# Altium PCB Controller.PcbDoc (part 1 of 2)
Units mil, origin at the board's own origin, x right, y up, seen from the top; angles counter-clockwise.
Board outline 1500 x 3000 mil, 2 copper layers (Top Layer, Bottom Layer); 44 components, 27 nets, 191 pads, 283 vias.
Unrouted connection lines stored in the file: 1.
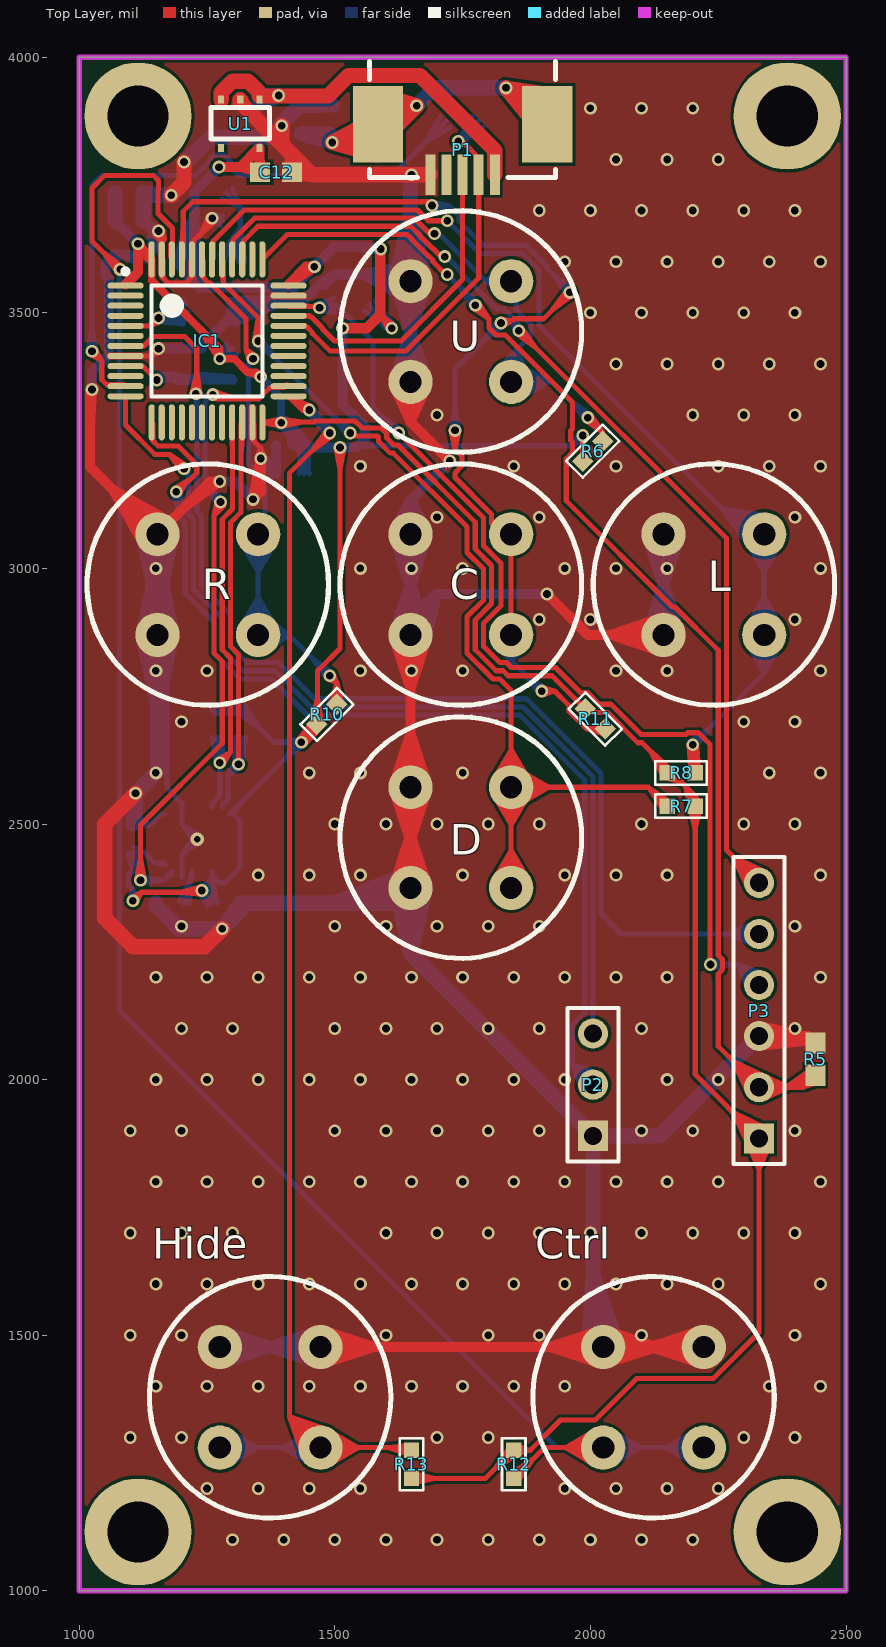
[diagram p0: Top Layer view]
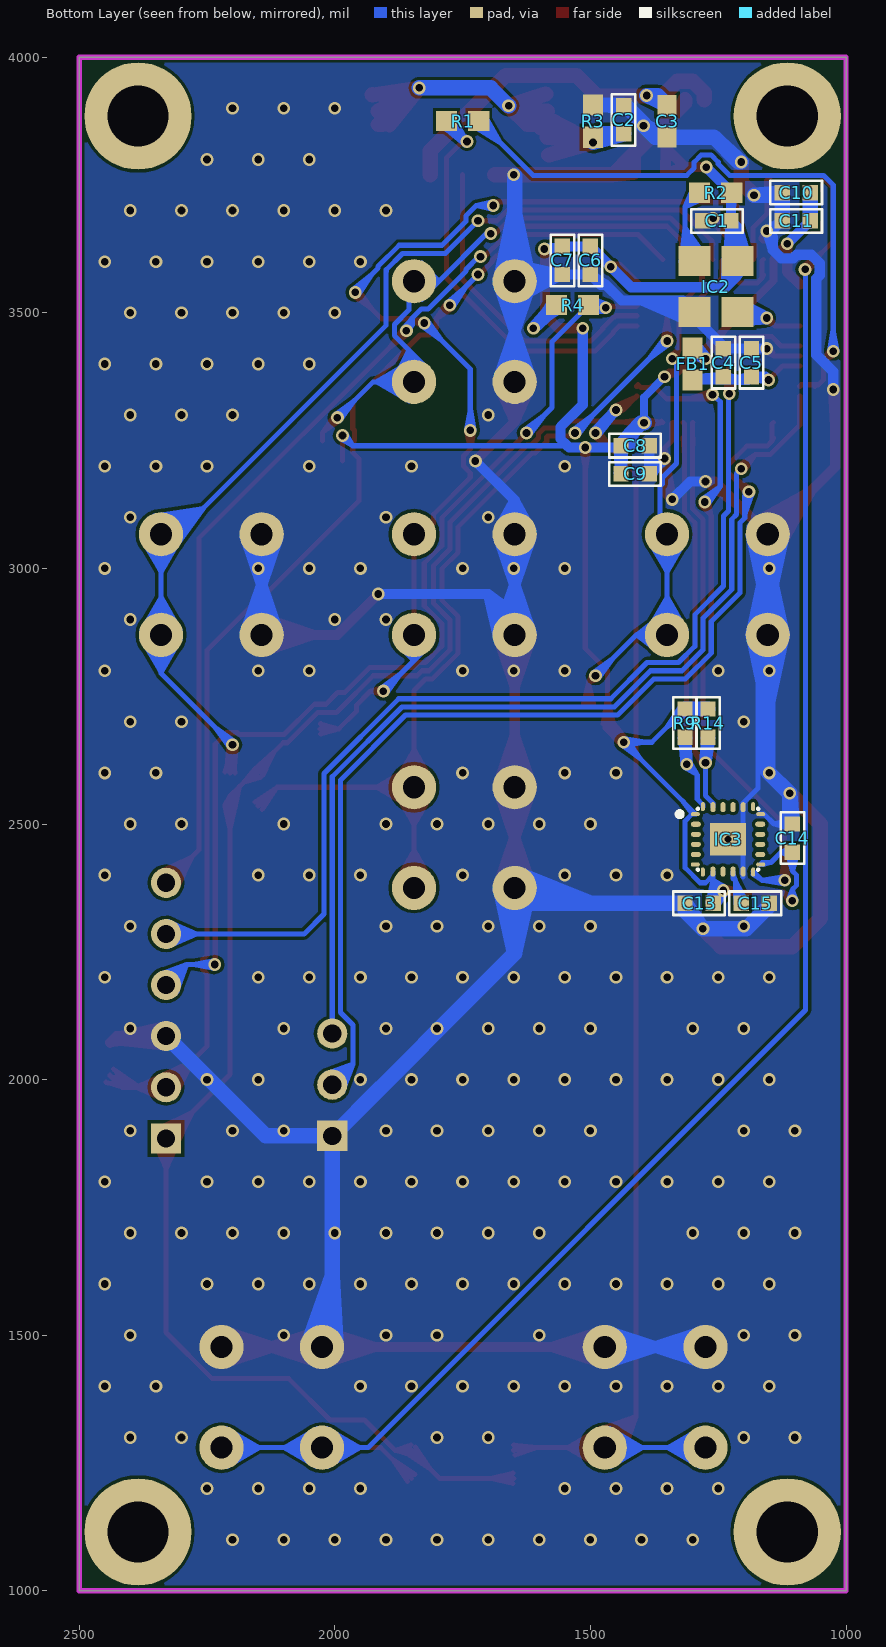
[diagram p1: Bottom Layer view, seen from below]

## Layer stack, top to bottom
Top Layer: signal copper 1.4
Dielectric: dielectric 12.6, FR-4, Dk 4.8
Bottom Layer: signal copper 1.4

## Board outline
1000,1000 2500,1000 2500,4000 1000,4000

## Design rules (kind name [scope] priority, off if disabled: settings)
Clearance [All] p1: gap=6
ComponentClearance [All] p1 off: gap=0 collisioncheckmode=3 verticalgap=10 showdistances=FALSE
DiffPairsRouting [All] p1: maxlimit=10 minlimit=10 mostfreqgap=10 maxuncoupledlength=500
PasteMaskExpansion [All] p1: expansion=-5
PolygonConnect [All] p1: connectstyle=Direct reliefconductorwidth=10 reliefentries=4 polygonreliefangle="90 Angle" airgapwidth=10
RoutingVias [All] p1: holewidth=28 width=25 viastyle="Through Hole" minholewidth=15 minwidth=25 maxholewidth=28 maxwidth=50
SilkscreenOverComponentPads [All] p1: minsilkscreentomaskgap=10
SolderMaskExpansion [All] p1: expansion=4
Width [All] p1: maxlimit=100 minlimit=10 preferedwidth=10
24 further rules are at their usual default settings.

## Classes and differential pairs
differential pair USBD: +USBD_P -USBD_N

## Components (designator, comment, footprint, x,y, rotation, side; value= is the part's Value field where it differs from the comment)
C "SW-SPST" "SPST C&K D6 Switch" 1845,2870 r90 top
C1 "100nF" 0603C-GENERIC 1280,3680 r180 bottom
C2 "4u7" 0603C-GENERIC 1435,3850 r90 bottom
C3 "Cap" CAPC0603 1350,3875 r270 bottom
C4 "10nF" 0603C-GENERIC 1240,3375 r90 bottom
C5 "1uF" 0603C-GENERIC 1185,3375 r90 bottom
C6 "100nF" 0603C-GENERIC 1500,3630 r270 bottom
C7 "100nF" 0603C-GENERIC 1555,3630 r270 bottom
C8 "100nF" 0603C-GENERIC 1440,3240 r180 bottom
C9 "100nF" 0603C-GENERIC 1440,3185 r180 bottom
C10 "100nF" 0603C-GENERIC 1070,3735 r0 bottom
C11 "4u7" 0603C-GENERIC 1070,3680 r0 bottom
C12 "Cap" CAPC0603 1385,3775 r0 top
C13 "10nF" 0603C-GENERIC 1315,2345 r180 bottom
C14 "100nF" 0603C-GENERIC 1105,2445 r90 bottom
C15 "100nF" 0603C-GENERIC 1205,2345 r180 bottom
Ctrl "SW-SPST" "SPST C&K D6 Switch" 2025,1280 r0 top
D "SW-SPST" "SPST C&K D6 Switch" 1845,2375 r90 top
FB1 "FBead" RES0603 1300,3400 r90 bottom
Hide "SW-SPST" "SPST C&K D6 Switch" 1275,1280 r0 top
IC1 "STM32F103C8T6" LQFP48_N 1250,3445 r0 top
IC2 "8MHz Oscillator" "3.2 x 5 mm 4-pin DFN" 1315,3625 r270 bottom
IC3 "IMU1" QFN50P300X300X100-24N 1230.79,2470 r180 bottom
L "SW-SPST" "SPST C&K D6 Switch" 2340,2870 r90 top
P1 "UX60SC-MB-5ST" UX60SC-MB-5ST 1750,3770 r180 top
P2 "Header 3" HDR1X3 2005,1890 r90 top
P3 "Header 6" HDR1X6 2330,1885 r90 top
R "SW-SPST" "SPST C&K D6 Switch" 1350,2870 r90 top
R1 "Res" RES0603 1750,3875 r0 bottom
R2 "Res" RES0603 1255,3735 r0 bottom
R3 "Res" RES0603 1495,3875 r90 bottom
R4 "Res" RES0603 1535,3515 r180 bottom
R5 "Res" RES0603 2440,2040 r90 top
R6 "10K" 0603R-10K 1985,3210 r45 top
R7 "10K" 0603R-10K 2205,2535 r180 top
R8 "10K" 0603R-10K 2150,2600 r0 top
R9 "10K" 0603R-10K 1315,2670 r90 bottom
R10 "10K" 0603R-10K 1465,2695 r45 top
R11 "10K" 0603R-10K 1990,2725 r315 top
R12 "10K" 0603R-10K 1850,1275 r270 top
R13 "10K" 0603R-10K 1650,1220 r90 top
R14 "10K" 0603R-10K 1270,2670 r90 bottom
U "SW-SPST" "SPST C&K D6 Switch" 1845,3365 r90 top
U1 "Reg1" SOT-25 1315,3925 r180 top

## Footprints (in the part's own frame and the unit in brackets; to place one, negate y for a bottom-side part, rotate by r counter-clockwise, add the part's x,y. Pads: shape width x height; smd on the part's side, far side on the other; paste and mask are expansions set on the pad)
"3.2 x 5 mm 4-pin DFN" [mm] "Footprint for Si501 Oscillator"
  rect 1.5x1.6 smd: 1(0.6,0.47) 2(3.14,0.47) 3(3.14,2.61) 4(0.6,2.61)
0603C-GENERIC [mil] "CAPACITOR 0603"
  rect 30x30 smd: 1(0,0) 2(55,0)
  silkscreen extent -23,-23 78,23, body extent -4,-15 59,15, height 19
0603R-10K [mil] "RESISTOR 0603"
  rect 30x30 smd: 1(0,0) 2(55,0)
  silkscreen extent -23,-23 78,23, body extent -4,-15 59,15, height 20
CAPC0603 [mm] "Chip Capacitor, 2-Leads, Body 1.60x0.80mm, IPC Medium Density"
  rect 1x0.95 smd: 1(-0.8,0) 2(0.8,0)
  body extent -0.88,-0.48 0.87,0.48, height 0.8
HDR1X3 [mm] "Connector; Header; 3 Position"
  rect 1.5x1.5 hole 0.9: 1(0,0)
  round 1.5 hole 0.9: 2(2.54,0) 3(5.08,0)
  silkscreen extent -1.27,-1.27 6.35,1.27
HDR1X6 [mm] "Connector; Header; 6 Position"
  rect 1.5x1.5 hole 0.9: 1(0,0)
  round 1.5 hole 0.9: 2(2.54,0) 3(5.08,0) 4(7.62,0) 5(10.16,0) 6(12.7,0)
  silkscreen extent -1.27,-1.27 13.97,1.27
LQFP48_N [mm] "Thin QFP, 48-Leads, Body 7x7mm, Pitch 0.5mm, IPC Medium Density"
  oval 1.8x0.3 smd: 1(-4.05,2.75) 2(-4.05,2.25) 3(-4.05,1.75) 4(-4.05,1.25) 5(-4.05,0.75) 6(-4.05,0.25) 7(-4.05,-0.25) 8(-4.05,-0.75) 9(-4.05,-1.25) 10(-4.05,-1.75) 11(-4.05,-2.25) 12(-4.05,-2.75) 25(4.05,-2.75) 26(4.05,-2.25) 27(4.05,-1.75) 28(4.05,-1.25) 29(4.05,-0.75) 30(4.05,-0.25) 31(4.05,0.25) 32(4.05,0.75) 33(4.05,1.25) 34(4.05,1.75) 35(4.05,2.25) 36(4.05,2.75)
  oval 0.3x1.8 smd: 13(-2.75,-4.05) 14(-2.25,-4.05) 15(-1.75,-4.05) 16(-1.25,-4.05) 17(-0.75,-4.05) 18(-0.25,-4.05) 19(0.25,-4.05) 20(0.75,-4.05) 21(1.25,-4.05) 22(1.75,-4.05) 23(2.25,-4.05) 24(2.75,-4.05) 37(2.75,4.05) 38(2.25,4.05) 39(1.75,4.05) 40(1.25,4.05) 41(0.75,4.05) 42(0.25,4.05) 43(-0.25,4.05) 44(-0.75,4.05) 45(-1.25,4.05) 46(-1.75,4.05) 47(-2.25,4.05) 48(-2.75,4.05)
  silkscreen extent -4.17,-2.75 2.75,3.57, body extent -3.5,-3.5 3.5,3.5, height 1.6
QFN50P300X300X100-24N [mm] "QFN, 24-Leads, Body 3.0x3.0mm (max), Pitch 0.50mm, IPC Medium Density"
  oval 0.45x0.2 smd: 1(-1.625,1.25) 6(-1.625,-1.25) 13(1.625,-1.25) 18(1.625,1.25)
  oval 0.5x0.25 smd: 2(-1.6,0.75) 3(-1.6,0.25) 4(-1.6,-0.25) 5(-1.6,-0.75) 14(1.6,-0.75) 15(1.6,-0.25) 16(1.6,0.25) 17(1.6,0.75)
  oval 0.2x0.45 smd: 7(-1.25,-1.625) 12(1.25,-1.625) 19(1.25,1.625) 24(-1.25,1.625)
  oval 0.25x0.5 smd: 8(-0.75,-1.6) 9(-0.25,-1.6) 10(0.25,-1.6) 11(0.75,-1.6) 20(0.75,1.6) 21(0.25,1.6) 22(-0.25,1.6) 23(-0.75,1.6)
  rect 1.8x1.6 smd: 25(0,0)
  silkscreen extent -2.53,-1.53 1.53,1.52, body extent -1.5,-1.5 1.5,1.5, height 1
RES0603 [mm] "Chip Resistor, 2-Leads, Body 1.60x0.80mm, IPC Medium Density"
  rect 1.05x1 smd: 1(-0.8,0) 2(0.8,0)
  body extent -0.88,-0.48 0.87,0.47, height 0.8
SOT-25 [mm] "Small Outline Transistor Package"
  rect 0.3x0.4 smd: 1(-0.95,0.2) 2(0,0.2) 3(0.95,0.2) 4(0.95,2.6) 5(-0.95,2.6)
  silkscreen extent -1.45,0.6 1.45,2.16
"SPST C&K D6 Switch" [mm]
  round 2.2 hole 1.1: 1(0,0) 1(5,0) 2(0,5) 2(5,5)
  silkscreen extent -3.5,-3.5 8.5,8.5
UX60SC-MB-5ST [mm] "USB Mini-B Recepticle"
  rect 0.5x2 smd: 1(-1.6,0) 2(-0.8,0) 3(0,0) 4(0.8,0) 5(1.6,0)
  rect 2.5x3.8 smd: SHD(-4.2,-2.5) SHD(4.2,-2.5)
  silkscreen extent -4.62,-5.62 4.62,0.13, body extent -4.9,-6.61 4.9,0.39, height 3.95

## Part data
C Ctrl D Hide L R U: "Single-Pole, Single-Throw Switch"
C1 C14 C15: library part 0603C-100NF-25V-X7R-TDK, "CAPACITOR 0603 CERAMIC"
C2 C11: library part 0603C-4U7-10V-X5R-TDK, "CAPACITOR 0603 CERAMIC"
C4 C13: library part 0603C-10NF-50V-X7R-MUR, "CAPACITOR 0603 CERAMIC"
C5: library part 0603C-1UF-25V-X5R-SAM, "CAPACITOR 0603 CERAMIC"
C6 C7 C8 C9 C10: library part 0603C-100NF-50V-X7R-TDK, "CAPACITOR 0603 CERAMIC"
FB1: "Ferrite Bead"
IC1: "STM32 ARM-based 32-bit MCU with 64 Kbytes Flash, 48-pin LQFP, Industrial Temperature"
IC2: library part "Si501 Oscillator", "Oscillator"
IC3: library part MPU9250, "9-DOF IMU"
P1: "USB Mini B Metal Shield SMT"
P2: "Header, 3-Pin"
P3: "Header, 6-Pin"
R6 R7 R8 R9 R10 R11 R12 R13 R14: library part 0603R-10K, "GENERIC RESISTOR 0603"
U1: library part 3VRegulator, "Voltage Regulator"

## Free pads (board coordinates)
  round 210 hole 120: 0(1115,1115) 0(1115,3885) 0(2385,1115) 0(2385,3885)
  round 10 smd: EndPad(1985,3260)

## Via types
v1: diameter 25, hole 15, Top Layer to Bottom Layer, tented both sides, 214 vias
v2: diameter 25, hole 15, Top Layer to Bottom Layer, 68 vias
v3: diameter 25.98, hole 12.99, Top Layer to Bottom Layer, tented top, 1 vias

## Nets (pads, with @x,y where several pads share a name; then routed paths per layer and width w, separated by ;. In a path a pad name is that pad's centre, name@x,y a point inside that pad or via, vN(x,y) a via of type N, cw(c..) or ccw(c..) an arc to the next point about the centre after c; other vN are vias at no path point)
+3.3: C1.2 C6.1 C7.1 C8.1 C9.1 C10.1 C11.1 C12.1 C13.2 C14.1 FB1.2 IC1.1 IC1.24 IC1.36 IC1.48 IC2.4 IC3.1 IC3.8 IC3.13 P3.1 pad.EndPad R2.1 R4.1 R6.1 R7.1 R8.1 R9.2 R10.1 R11.1 R12.1 R13.1 R14.2 U1.5 | length 15753.6
  Top Layer w10: v2@1100.62,2356.09 1121.5,2366.5 ; v2(1105,2350) 1121.5,2366.5 ; v2@1111.09,2345.62 1121.5,2366.5 ; v2@1238.74,2377.39 1196.97,2366.5 ; v2@1239.96,2362.5 1196.97,2366.5 ; IC1.24@1361.22,3288.5 1364.72,3285 ; v2@1394.07,3277.56 1364.72,3285 ; v2@1394.07,3292.44 1364.72,3285 ; v2@1394.12,3277.55 IC1.24@1358.27,3285.55 ; v2@1394.19,3285 IC1.24@1358.27,3285.55 ; v2@1394.35,3292.47 IC1.24@1358.27,3285.55 ; v2@1395,3288.5 1397,3286.5 1459.73,3286.5 1461.73,3288.5 1539.73,3288.5 1553.5,3274.73 1590.27,3274.73 1601.5,3263.5 1601.5,3255.27 1615.27,3241.5 1623.5,3241.5 1774.69,3090.31 1774.69,3037.73 1806.69,3005.73 1806.69,2931.12 1774.69,2899.12 1774.69,2840.88 1815.88,2799.69 1829.32,2799.69 1839.01,2790 1925,2790 R11.1@1990,2725 1996.68,2718.32 2033.45,2718.32 2092.77,2659 2101,2659 2179,2581 ; v2@1395.4,3292.49 1437.57,3286.5 ; v2@1395.92,3277.56 1437.57,3286.5 ; v2@1428.31,2664.14 R10.1@1455.77,2698.83 ; v2@1429.32,2665.36 R10.1@1465,2695 ; v2@1429.75,2665.75 R10.1@1465,2690.43 ; v2@1430.6,2666.37 R10.1@1471.15,2687.18 ; v2@1439.52,2654.37 R10.1@1471.15,2687.18 ; v2@1440.31,2655.18 R10.1@1465,2690.43 ; v2@1440.61,2655.55 R10.1@1465,2695 ; v2@1441.43,2656.98 R10.1@1455.77,2698.83 ; R10.1@1455.08,2696.27 1466.5,2745.95 ; R10.1@1456.77,2700.68 v2@1435.32,2660.75 ; R10.1@1471.79,2687.66 v2@1435.32,2660.75 ; R10.1@1474.98,2695.69 1466.5,2745.95 ; v2@1502.53,3235.84 1510,3194 ; v2@1517.47,3235.84 1510,3194 ; v2@1605.33,3465.73 1588.84,3496.16 ; v2@1616.6,3475.5 1588.84,3496.16 ; R13.1@1650,1220 1795,1220 R12.1@1850,1275 ; R13.1@1651.11,1210.06 1695,1220 R13.1@1651.11,1229.94 ; R12.1@1842.27,1281.35 1813.79,1238.79 ; R12.1@1851.54,1265.12 1882.37,1275 ; R12.1@1851.54,1284.88 1882.37,1275 ; R12.1@1856.35,1267.27 1813.79,1238.79 ; R6.1@1985,3210 v2(1985,3260) R6.1@1985,3225 ; R8.1@2141.46,2594.8 2119.56,2640.44 ; R8.1@2145.78,2590.93 2179,2581 ; R8.1@2156.63,2607.49 2179,2581 ; R8.1@2157.36,2606.77 2119.56,2640.44 ; R7.1@2195.06,2533.89 2205,2490 R7.1@2214.94,2533.89 ; R7.1@2195.57,2531.69 2186,2574 ; R7.1@2213.43,2540.39 2186,2574 ; P3.1@2306,1879.95 2330,1825.47 ; P3.1@2309.95,1870.88 2279.26,1935.74 ; P3.1@2315.58,1883.23 2330,1825.47 ; P3.1@2318.74,1875.82 2279.26,1935.74 ; P3.1@2339.18,1896.26 2279.26,1935.74 ; P3.1@2344.12,1905.05 2279.26,1935.74 ; P3.1@2344.42,1883.23 2330,1825.47 ; P3.1@2354,1879.95 2330,1825.47 ; 1121.5,2366.5 1236.5,2366.5 v2(1240,2370) 1196.97,2366.5 ; IC1.24@1358.27,3285.55 v2(1395,3285) ; IC1.24@1358.27,3285.55 1364.72,3285 ; IC1.24@1358.27,3285.55 1364.72,3285 ; 1364.72,3285 v2(1395,3285) ; v2(1395,3285) 1437.57,3286.5 ; v2(1434.57,2660) R10.1@1465,2695 ; v2(1434.57,2660) R10.1@1455.77,2698.83 ; v2(1434.57,2660) R10.1@1471.15,2687.18 ; v2(1434.57,2660) R10.1@1465,2690.43 ; v2@1435.32,2660.75 R10.1@1465,2695 ; R10.1@1465,2690.43 R10.1@1465,2695 ; R10.1@1465,2695 1466.5,2745.95 ; R10.1@1465,2695 1466.5,2696.5 1466.5,2799.73 1510,2843.23 v2(1510,3236.5) 1510,3194 ; 1588.84,3496.16 v2(1611.5,3470) 1611.5,3473.5 1588.84,3496.16 ; 1813.79,1238.79 R12.1@1850,1275 ; R12.1@1850,1275 1882.37,1275 ; 1882.37,1275 1941.68,1334.31 2009.31,1334.31 2090,1415 2240,1415 2330,1505 P3.1@2330,1885 2205,2010 R7.1@2205,2535 ; 2119.56,2640.44 R8.1@2150,2600 2179,2581 ; 2179,2581 2179,2580.44 2185.44,2574 2186,2574 ; 2186,2574 R7.1@2205,2535 ; 2186,2574 2205,2555 ; R7.1@2205,2535 2205,2555 ; R7.1@2205,2535 2205,2555 ; 2205,2555 2214.68,2537.5 2205,2555 ; 2205,2555 2195.32,2537.5 2205,2555
  Top Layer w15: IC1.48@1141.73,3604.45 1141.73,3563.27 ; 1238.32,3466.68 v2(1275,3410) ; 1141.73,3563.27 1141.73,3574.92 1141.73,3563.27 ; 1141.73,3563.27 1275,3430 ; v2(1275,3410) 1275,3430 ; v2(1275,3410) 1275,3430 ; v2(1275,3410) 1303.23,3410 1329.23,3384 ; 1329.23,3384 v2(1355,3375) 1346,3384 1329.23,3384
  Top Layer w20: IC1.1@1090.55,3555.49 1091.56,3556.5 1091.81,3556.5 1115,3579.7 ; v2(1273.51,3785) 1314.76,3785 ; v2(1515,3470) 1562.69,3470 1588.84,3496.16 1588.84,3623.84 v2(1590,3625) ; 1115,3579.7 v2(1115,3635) ; 1115,3579.7 v2@1115,3628.96 ; v2@1115,3628.96 v2(1115,3635) ; v2@1115,3628.96 1139.51,3604.45 v2(1115,3635) ; 1314.76,3785 1352.52,3775 1314.76,3785 ; 1314.76,3785 U1.5@1352.4,3820.67 ; 1314.76,3785 U1.5@1352.4,3822.64 ; C12.1@1352.4,3776.1 U1.5@1352.4,3820.67 ; C12.1@1352.4,3776.1 U1.5@1352.4,3822.64 ; C12.1@1352.4,3776.1 C12.1@1353.5,3775 ; U1.5@1352.4,3820.67 C12.1@1353.5,3775 ; U1.5@1352.4,3820.67 C12.1@1353.5,3775 ; U1.5@1352.4,3822.64 C12.1@1353.5,3775 ; U1.5@1352.4,3822.64 C12.1@1353.5,3775 ; 1443.96,3590 v2(1460,3590) ; 1443.96,3590 1409.45,3555.49 v2(1460,3590) ; 1443.96,3590 v2(1460,3590)
  Bottom Layer w10: C14.1@1095.09,2443.64 1105,2408.23 ; v2@1097.61,2351.29 1105,2371.77 ; v2(1105,2350) 1105,2371.77 ; C14.1@1107.33,2435.27 1126.5,2445 ; C14.1@1107.33,2454.73 1126.5,2445 ; v2@1112.39,2351.29 1105,2371.77 ; C14.1@1114.91,2443.64 1105,2408.23 ; IC3.13@1161.89,2420.79 1146.95,2424.55 ; IC3.13@1167.8,2420.79 1164.03,2424.55 1146.95,2424.55 ; v2@1233.35,2366.53 C13.2@1251.79,2339.29 ; v2@1233.59,2366.11 C13.2@1250.07,2346.18 ; v2@1235.49,2375.99 1260.31,2390 ; v2@1236.7,2363.27 C13.2@1265.71,2353.21 ; v2@1244.84,2375.73 C13.2@1265.71,2353.21 ; v2@1245.92,2365.39 1260.31,2390 ; v2@1247.26,2371.87 C13.2@1251.79,2339.29 ; v2@1247.26,2371.89 C13.2@1250.07,2346.18 ; 1260.31,2367.17 IC3.8@1260.31,2402.09 ; IC3.8@1260.31,2407.01 IC3.8@1260.31,2399.26 ; v2@1268.56,3413.85 FB1.2@1287.81,3438.71 ; C13.2@1269.95,2346.04 1260.31,2390 ; v2@1270.79,3416.21 FB1.2@1300,3431.5 ; v2@1270.95,3416.31 FB1.2@1300,3430.51 ; v2@1274.04,3417.44 FB1.2@1307.7,3418.01 ; v2@1277.58,3402.96 FB1.2@1307.7,3418.01 ; v2@1280.4,3404.79 FB1.2@1300,3430.51 ; v2@1280.5,3404.91 FB1.2@1300,3431.5 ; v2@1282.16,3407.78 FB1.2@1287.81,3438.71 ; IC3.1@1299.68,2519.21 1319.43,2544.87 ; R9.2@1308.65,2717.27 1351.21,2688.79 R9.2@1322.73,2731.35 ; R9.2@1315,2725 1380,2660 v2(1434.57,2660) 1293.78,2519.21 1301.53,2519.21 1314.62,2506.12 1314.62,2414.19 1285.43,2385 1274.57,2385 IC3.8@1260.31,2399.26 ; v2@1428.86,2664.87 1400.85,2626.29 v2@1439.44,2654.3 ; C8.1@1430.02,3240.64 C9.1@1432.11,3195.17 ; C9.1@1430.06,3186.11 1440,3230 C9.1@1449.94,3186.11 ; C8.1@1430.06,3238.89 C9.1@1440,3195 ; C8.1@1430.4,3237.2 C9.1@1447.89,3195.17 ; v2@1433.91,2652.53 1392.07,2660 v2@1433.91,2667.47 ; C9.1@1440,3185 C8.1@1440,3236.5 ; C8.1@1449.6,3237.2 C9.1@1432.11,3195.17 ; C8.1@1449.94,3238.89 C9.1@1440,3195 ; C8.1@1449.98,3240.64 C9.1@1447.89,3195.17 ; 1545.31,3240 1965,3240 ; R4.1@1558.38,3503.48 v2@1607.39,3474.1 ; R4.1@1566.5,3515 v2(1611.5,3470) ; R4.1@1567.48,3515 v2@1607.39,3474.1 ; R4.1@1579.22,3523.82 v2@1607.39,3474.1 ; v2@1604.8,3466.63 1588.14,3508.08 ; v2@1605.74,3465.19 R4.1@1578.28,3503.93 ; v2@1605.79,3465.13 R4.1@1577.78,3503.71 ; v2@1606.93,3464.05 1573.76,3494.26 ; v2@1615.01,3476.63 1573.76,3494.26 ; v2@1616.37,3475.7 R4.1@1577.78,3503.71 ; v2@1616.42,3475.65 R4.1@1578.28,3503.93 ; v2@1617.54,3474.44 1588.14,3508.08 ; v2@1979.04,3264.55 1965,3240 ; v2@1989.55,3254.04 1965,3240 ; 1105,2371.77 1096.5,2380.27 1096.5,2399.73 1105,2408.23 ; 1105,2408.23 C14.1@1105,2445 ; 1105,2408.23 C14.1@1105,2445 ; C14.1@1105,2445 1126.5,2445 ; 1126.5,2445 1146.95,2424.55 ; v2@1240,2365 C13.2@1260,2345 ; v2@1240,2365 C13.2@1265.71,2353.21 ; v2@1240,2365 C13.2@1251.79,2339.29 ; v2@1240,2365 C13.2@1260,2345 ; v2@1240,2365 v2(1240,2370) ; v2(1240,2370) C13.2@1250.07,2346.18 ; v2(1240,2370) 1260.31,2390 ; v2(1240,2370) C13.2@1260,2345 ; v2(1240,2370) C13.2@1265.71,2353.21 ; v2(1240,2370) C13.2@1251.79,2339.29 ; v2(1240,2370) C13.2@1260,2345 ; C13.2@1250.07,2346.18 1260.31,2390 ; C13.2@1260,2345 1234.73,2364.66 C13.2@1260,2345 ; C13.2@1260,2345 1246.37,2373.97 C13.2@1260,2345 ; C13.2@1260,2345 1260.31,2390 ; C13.2@1260,2345 1260.31,2345.31 IC3.8@1260.31,2399.26 ; v2@1275,3406.5 FB1.2@1300,3430.51 ; v2@1275,3406.5 FB1.2@1287.81,3438.71 ; v2@1275,3406.5 FB1.2@1307.7,3418.01 ; v2@1275,3406.5 v2(1275,3410) ; v2@1275,3406.5 FB1.2@1300,3431.5 ; v2(1275,3410) FB1.2@1287.81,3438.71 ; v2(1275,3410) FB1.2@1300,3430.51 ; v2(1275,3410) FB1.2@1307.7,3418.01 ; v2(1275,3410) FB1.2@1300,3431.5 ; C9.1@1432.11,3195.17 C8.1@1440,3240 ; C9.1@1440,3195 C8.1@1440,3240 ; C8.1@1440,3240 C9.1@1447.89,3195.17 ; 1573.76,3494.26 v2(1611.5,3470) ; R4.1@1577.78,3503.71 v2(1611.5,3470) ; R4.1@1578.28,3503.93 v2(1611.5,3470) ; 1588.14,3508.08 v2(1611.5,3470) ; 1965,3240 v2(1985,3260) 1965,3240
  Bottom Layer w15: v2(1355,3375) 1395,3335 v2(1395,3285)
  Bottom Layer w20: IC2.4@1197.68,3590.98 1235,3550 ; IC2.4@1214.21,3601.38 1235,3550 ; R2.1@1224.49,3735 C1.2@1225,3680 ; IC2.4@1233.32,3605.4 1235,3550 ; C8.1@1440,3240 1421,3245 1429.5,3236.5 C8.1@1440,3236.5 ; 1515,3397.5 v2(1515,3470) 1515,3320.3 1558.5,3276.8 1558.5,3253.2 1545.31,3240 1541.81,3236.5 v2(1510,3236.5) ; IC2.4@1212.24,3601.38 C1.2@1225,3680 ; IC2.4@1212.24,3601.38 C1.2@1212.24,3667.24 ; IC2.4@1212.24,3601.38 1212.24,3572.76 1235,3550 ; C1.2@1212.24,3667.24 1231.56,3604.27 C1.2@1225,3680 ; C1.2@1212.24,3667.24 1192.93,3604.27 C1.2@1225,3680 ; C1.2@1212.24,3667.24 C1.2@1225,3680 ; R2.1@1223.5,3735 v2(1273.51,3785) R2.1@1223.5,3735 ; R2.1@1223.5,3735 1225,3733.5 C1.2@1225,3680 ; 1235,3550 1420,3550 ; 1420,3550 v2(1460,3590) ; 1420,3550 v2(1460,3590) ; C8.1@1440,3236.5 v2(1510,3236.5) ; C8.1@1440,3236.5 v2(1510,3236.5) ; v2(1460,3590) C6.1@1500,3630 ; v2(1460,3590) C6.1@1500,3630 ; C6.1@1500,3630 C7.1@1555,3630 ; C7.1@1555,3630 v2(1590,3625) ; C7.1@1555,3630 v2(1590,3625) ; C7.1@1555,3630 C7.1@1560,3625 ; C7.1@1560,3625 v2(1590,3625) ; C7.1@1560,3625 v2(1590,3625) ; C11.1@1070,3680 v2(1115,3635) C11.1@1070,3680
  Bottom Layer w30: R14.2@1270,2725 R9.2@1315,2725 ; v2(1395,3285) 1399.7,3285 1421,3263.7 ; 1421,3263.7 C8.1@1440,3240 ; 1421,3263.7 C8.1@1440,3240 ; 1421,3263.7 1421,3245 C8.1@1440,3240 ; C11.1@1070,3680 C10.1@1070,3735 C11.1@1070,3680
+5: C3.1 P1.1 U1.1 U1.3 | length 1100.2
  Top Layer w30: U1.3@1277.6,3917.13 1277.6,3930.64 ; U1.1@1352.4,3924.56 1352.4,3930.64 1329.91,3953.13 1300.09,3953.13 1277.6,3930.64 ; P1.1@1812.99,3770 1812.99,3817.41 ; 1277.6,3930.64 1277.6,3919.09 1277.6,3930.64 ; v2@1390,3924.25 1486.76,3924.25 ; v2@1390,3924.25 1359.53,3924.25 v2(1390,3925) ; v2@1390,3924.25 v2(1390,3925) ; v2(1390,3925) 1486.76,3924.25 ; 1486.76,3924.25 1526.73,3964.23 1666.18,3964.23 1812.99,3817.41 ; 1812.99,3817.41 1812.99,3799.53 1812.99,3817.41
  Bottom Layer w30: C3.1@1368.5,3925 v2(1390,3925) ; C3.1@1368.5,3925 v2(1390,3925) ; C3.1@1368.5,3925 v2(1390,3925) ; C3.1@1368.5,3925 C3.1@1350,3906.5 v2(1390,3925) ; v2(1390,3925) 1350,3907.48 v2(1390,3925)
CENTER: C.1 IC1.45 R11.2 | length 3591.5
  Top Layer w10: IC1.45@1200.79,3633.98 1203.57,3669.93 ; IC1.45@1203.57,3607.23 1203.57,3698.57 1222.27,3717.27 1567.27,3717.27 1682.73,3717.27 v2(1690,3710) ; v2@1727.54,3269.24 1735,3233.23 ; v2@1742.46,3269.24 1735,3233.23 ; v2@1824.57,3487.49 1846.77,3485 ; v2@1827.88,3473.08 1846.77,3485 ; C.1@1845,2870 C.1@1845,3066.85 1828.15,3066.85 1806.69,3088.31 1806.69,3105.93 1735,3177.63 1735,3186.77 1748.5,3200.27 1748.5,3219.73 1735,3233.23 ; v2(1905,2760) 1930,2760 ; v2@1906.12,2752.58 1930,2760 ; v2@1906.12,2767.42 1930,2760 ; v2@1954.3,3544.87 1926.29,3506.29 v2@1964.87,3534.3 ; v2(1960,3540) 1908.5,3488.5 1850.27,3488.5 1846.77,3485 ; R11.2@2027.53,2676.2 1992.12,2686.11 ; R11.2@2027.53,2696.02 1992.12,2686.11 ; 1735,3233.23 v2(1735,3270) 1735,3233.23 ; 1846.77,3485 v2(1825,3480) 1830,3485 1846.77,3485 ; 1930,2760 1957.79,2732.21 1957.79,2720.44 1992.12,2686.11 ; 1992.12,2686.11 R11.2@2028.89,2686.11 1992.12,2686.11
  Bottom Layer w10: v2@1690.85,3702.55 1723.23,3710 ; v2@1690.85,3717.45 1723.23,3710 ; v2@1727.53,3270.66 1735,3312.5 v2@1742.47,3270.66 ; v2(1735,3270) 1735,3390 v2(1825,3480) 1791.29,3446.29 ; C.1@1809.62,2855.33 1845,2820 ; C.1@1817.85,2861.99 1845,2820 ; v2@1819.3,3484.87 1791.29,3446.29 ; C.1@1827,2866.65 1845,2820 ; v2@1829.87,3474.3 1791.29,3446.29 ; C.1@1836.72,2869.31 1845,2820 ; C.1@1845,2870 1845,2820 ; C.1@1853.28,2869.31 1845,2820 ; C.1@1863,2866.65 1845,2820 ; C.1@1872.15,2861.99 1845,2820 ; C.1@1880.38,2855.33 1845,2820 ; v2@1899.3,2755.13 1871.29,2793.71 ; v2@1909.87,2765.7 1871.29,2793.71 ; v2@1954.11,3535.36 1927.91,3574.72 ; v2@1965.09,3545.51 1927.91,3574.72 ; 1723.23,3710 v2(1690,3710) 1695,3710 1723.23,3710 ; 1723.23,3710 1743.5,3689.73 1743.5,3679.13 1790.47,3632.16 1874.12,3632.16 1915.31,3590.97 1915.31,3587.32 1961.31,3541.31 v2(1960,3540) 1927.91,3574.72 ; 1845,2820 v2(1905,2760) 1871.29,2793.71
CONTROL: Ctrl.1 IC1.46 R12.2 | length 6307
  Top Layer w10: v2@1074.3,3580.13 1046.29,3618.71 ; v2@1084.87,3590.7 1046.29,3618.71 ; IC1.46@1181.1,3604.45 1181.1,3607.39 1178.32,3610.17 1178.32,3632.81 1182.25,3636.74 1182.25,3665.98 1154,3694.23 1154,3740.77 1155,3741.77 1155,3759 1145,3769 1050,3769 1025,3744 1025,3640 v2(1080,3585) 1046.29,3618.71 ; R12.2@1843.65,1227.73 1886.21,1256.21 R12.2@1857.73,1213.65 ; R12.2@1850,1220 1910,1280 Ctrl.1@2025,1280 1951.69,1280 ; Ctrl.1@2014.99,1243.02 1951.69,1280 ; Ctrl.1@2014.99,1316.98 1951.69,1280 ; Ctrl.1@2019.53,1252.23 1951.69,1280 ; Ctrl.1@2019.53,1307.77 1951.69,1280 ; Ctrl.1@2022.71,1261.84 1951.69,1280 ; Ctrl.1@2022.71,1298.16 1951.69,1280 ; Ctrl.1@2024.53,1271.71 1951.69,1280 ; Ctrl.1@2024.53,1288.29 1951.69,1280
  Bottom Layer w10: v2(1080,3585) 1079,3584 1079,2136 1935,1280 Ctrl.1@2025,1280 Ctrl.1@2221.85,1280 ; Ctrl.1@2014.99,1243.02 1951.69,1280 ; Ctrl.1@2014.99,1316.98 1951.69,1280 ; Ctrl.1@2019.53,1252.23 1951.69,1280 ; Ctrl.1@2019.53,1307.77 1951.69,1280 ; Ctrl.1@2022.71,1261.84 1951.69,1280 ; Ctrl.1@2022.71,1298.16 1951.69,1280 ; Ctrl.1@2024.53,1271.71 1951.69,1280 ; Ctrl.1@2024.53,1288.29 1951.69,1280 ; Ctrl.1@2025.47,1271.71 2098.31,1280 ; Ctrl.1@2025.47,1288.29 2098.31,1280 ; Ctrl.1@2027.29,1261.84 2098.31,1280 ; Ctrl.1@2027.29,1298.16 2098.31,1280 ; Ctrl.1@2030.47,1252.23 2098.31,1280 ; Ctrl.1@2030.47,1307.77 2098.31,1280 ; Ctrl.1@2035.01,1243.02 2098.31,1280 ; Ctrl.1@2035.01,1316.98 2098.31,1280 ; Ctrl.1@2211.84,1243.02 2148.54,1280 ; Ctrl.1@2211.84,1316.98 2148.54,1280 ; Ctrl.1@2216.38,1252.23 2148.54,1280 ; Ctrl.1@2216.38,1307.77 2148.54,1280 ; Ctrl.1@2219.56,1261.84 2148.54,1280 ; Ctrl.1@2219.56,1298.16 2148.54,1280 ; Ctrl.1@2221.38,1271.71 2148.54,1280 ; Ctrl.1@2221.38,1288.29 2148.54,1280
DOWN: D.1 IC1.41 R7.2 | length 4689.5
  Top Layer w10: IC1.41@1279.53,3574.92 1282.31,3558.01 ; IC1.41@1279.53,3604.45 1282.31,3601.67 1282.31,3558.01 ; v2@1342.53,3445.66 1350,3487.5 v2@1357.47,3445.66 ; v2(1350,3445) 1350,3490.32 1282.31,3558.01 ; v2(1530,3265) 1536.27,3258.73 1583.64,3258.73 1585.5,3256.87 1585.5,3248.64 1608.64,3225.5 1614.5,3225.5 1758.69,3081.31 1758.69,3031.1 1790.69,2999.1 1790.69,2937.75 1758.69,2905.75 1758.69,2834.25 1809.25,2783.69 1822.69,2783.69 1845,2761.39 D.1@1845,2571.85 ; D.1@1808.02,2385.01 1845,2448.31 ; D.1@1808.02,2561.84 1845,2498.54 ; D.1@1808.02,2581.86 1845,2645.16 ; D.1@1817.23,2380.47 1845,2448.31 ; D.1@1817.23,2566.38 1845,2498.54 ; D.1@1817.23,2577.32 1845,2645.16 ; D.1@1826.84,2377.29 1845,2448.31 ; D.1@1826.84,2569.56 1845,2498.54 ; D.1@1826.84,2574.14 1845,2645.16 ; D.1@1836.71,2375.47 1845,2448.31 ; D.1@1836.71,2571.38 1845,2498.54 ; D.1@1836.71,2572.32 1845,2645.16 ; D.1@1845,2375 D.1@1845,2571.85 ; D.1@1845.47,2563.56 1918.31,2571.85 ; D.1@1845.47,2580.14 1918.31,2571.85 ; D.1@1847.29,2553.69 1918.31,2571.85 ; D.1@1847.29,2590.01 1918.31,2571.85 ; D.1@1850.47,2544.08 1918.31,2571.85 ; D.1@1850.47,2599.62 1918.31,2571.85 ; D.1@1853.29,2375.47 1845,2448.31 ; D.1@1853.29,2571.38 1845,2498.54 ; D.1@1853.29,2572.32 1845,2645.16 ; D.1@1855.01,2534.87 1918.31,2571.85 ; D.1@1855.01,2608.83 1918.31,2571.85 ; D.1@1863.16,2377.29 1845,2448.31 ; D.1@1863.16,2569.56 1845,2498.54 ; D.1@1863.16,2574.14 1845,2645.16 ; D.1@1872.77,2380.47 1845,2448.31 ; D.1@1872.77,2566.38 1845,2498.54 ; D.1@1872.77,2577.32 1845,2645.16 ; D.1@1881.98,2385.01 1845,2448.31 ; D.1@1881.98,2561.84 1845,2498.54 ; D.1@1881.98,2581.86 1845,2645.16 ; R7.2@2142.27,2528.65 2113.79,2571.21 ; R7.2@2156.35,2542.73 2113.79,2571.21 ; D.1@1845,2571.85 2113.15,2571.85 R7.2@2150,2535 2113.79,2571.21
  Bottom Layer w10: v2@1345.13,3439.3 1383.71,3411.29 v2@1355.7,3449.87 ; v2(1350,3445) v2(1530,3265) 1496.29,3298.71 ; v2@1524.3,3260.13 1496.29,3298.71 ; v2@1534.87,3270.7 1496.29,3298.71
EXTINT: IC1.26 IC3.12 | length 1848.8
  Top Layer w10: v2@1112.53,2390.66 1120,2432.5 v2@1127.47,2390.66 ; v2(1120,2390) 1120,2498.23 1279.69,2657.93 1279.69,2818.25 1263.69,2834.25 1263.69,3103.69 ; v2@1260.31,3332.53 1307.25,3331.99 ; v2@1262.87,3347.26 1307.25,3331.99 ; v2@1269.31,3132.37 1263.69,3103.69 ; v2@1282.7,3125.89 1263.69,3103.69 ; IC1.26@1409.45,3356.42 1406.67,3359.2 1401.11,3353.64 1372.92,3353.64 ; 1263.69,3103.69 v2(1276.42,3130) 1283.21,3123.21 1263.69,3103.69 ; 1307.25,3331.99 v2(1261,3340) 1269.01,3331.99 1351.27,3331.99 1372.92,3353.64 ; 1372.92,3353.64 1379.92,3356.42 1372.92,3353.64
  Bottom Layer w10: v2(1120,2390) 1164.57,2390 ; v2@1120.66,2382.53 1162.5,2390 v2@1120.66,2397.47 ; IC3.12@1181.57,2401.1 1164.57,2390 ; IC3.12@1181.57,2407.01 1164.57,2390 ; v2(1261,3340) 1260,3340 1251.77,3331.77 1246,3326 1246,3160.42 ; v2@1270.68,3125.18 1246,3160.42 ; v2@1281.24,3135.75 1246,3160.42 ; 1246,3160.42 v2(1276.42,3130) 1246,3160.42